# Altium PCB PCB1.PcbDoc
Units mil, origin at the board's own origin, x right, y up, seen from the top; angles counter-clockwise.
Board outline 2725 x 1595 mil, 2 copper layers (Top Layer, Bottom Layer); 40 components, 26 nets, 100 pads, 4 vias.
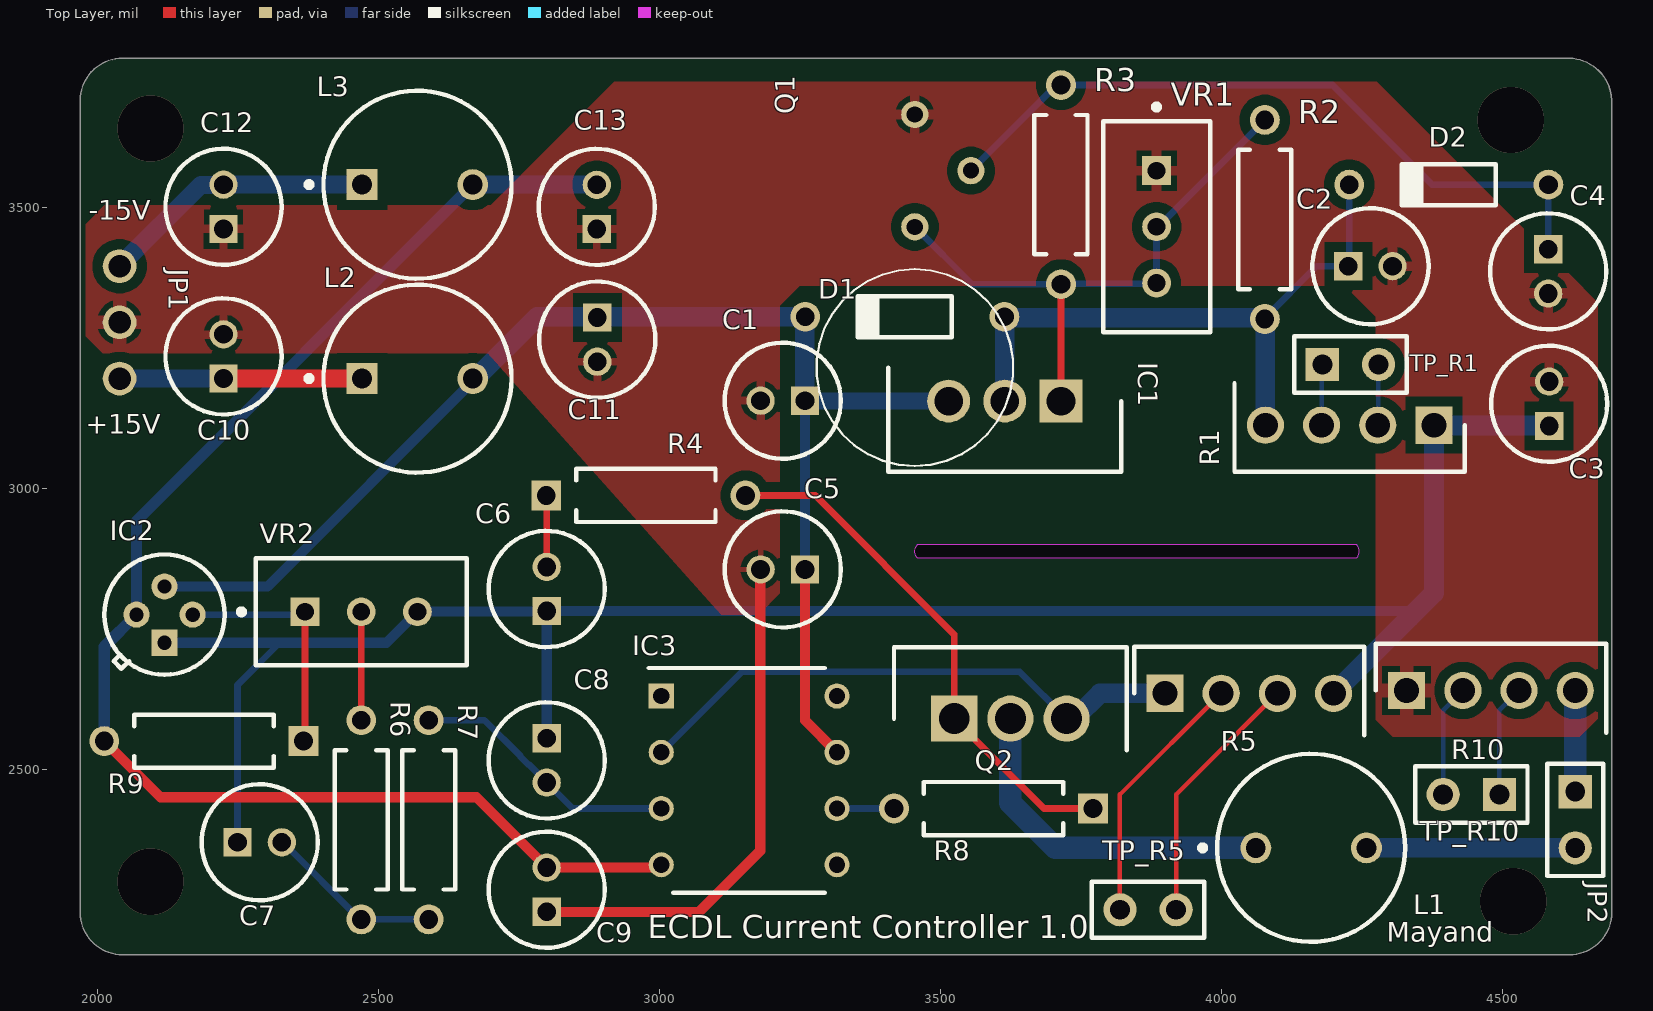
[diagram p0: Top Layer view]
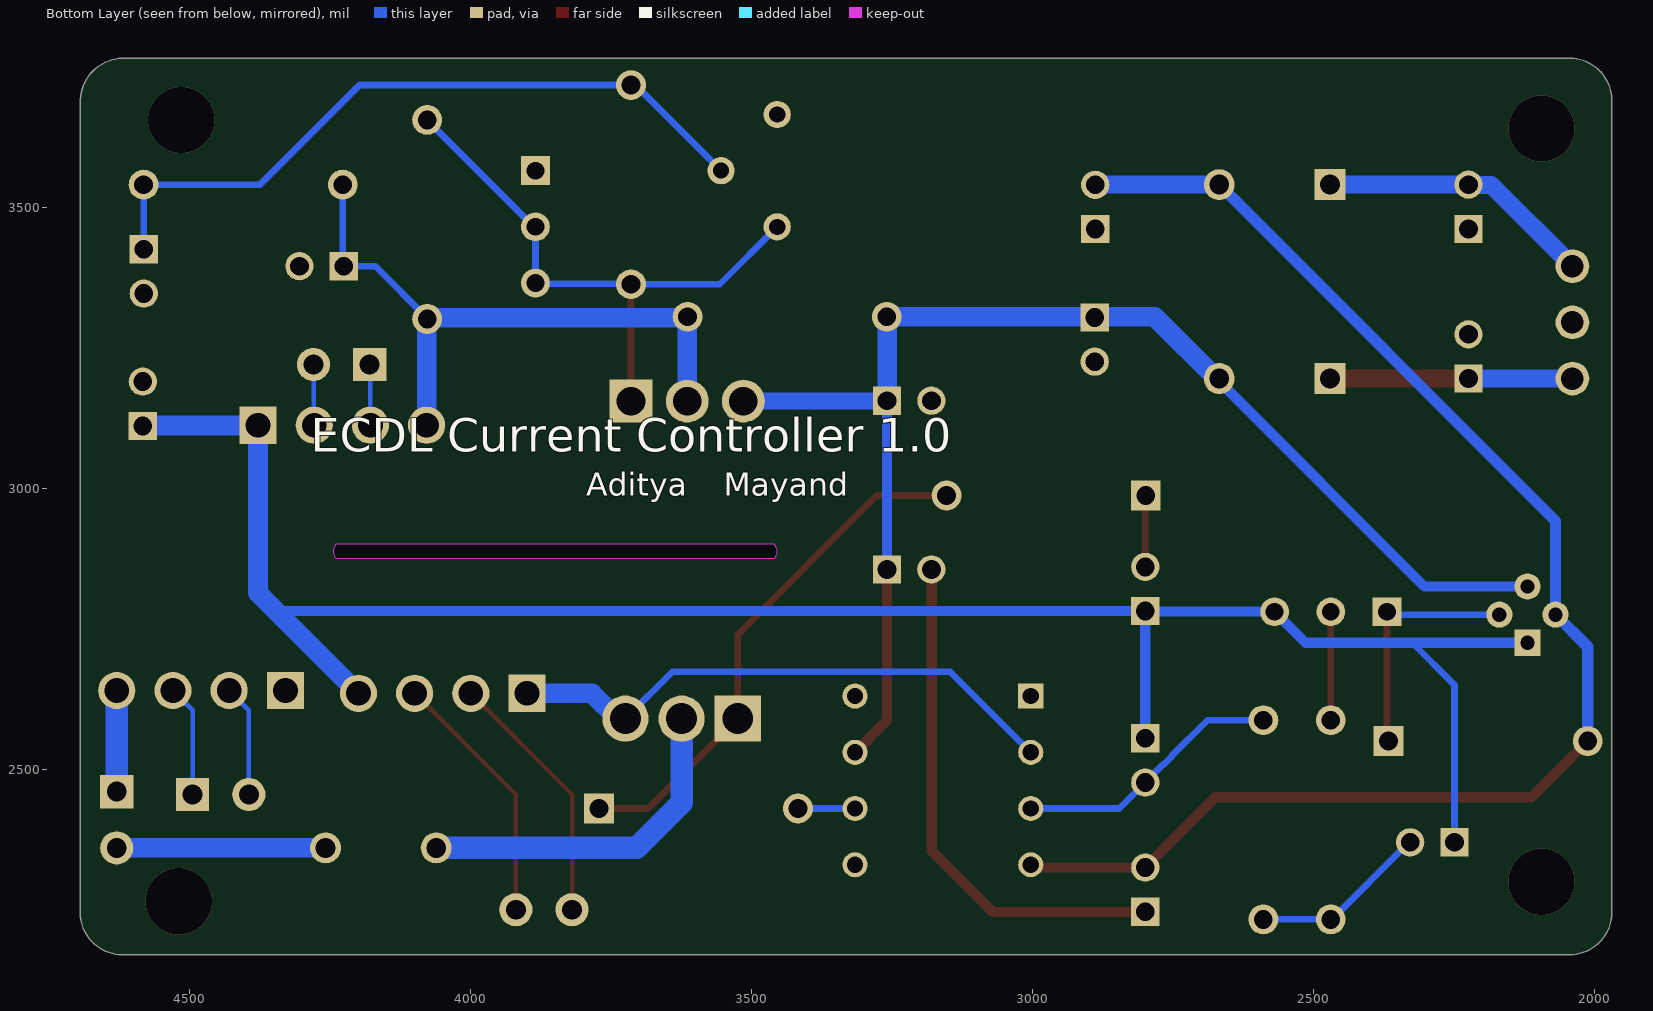
[diagram p1: Bottom Layer view, seen from below]
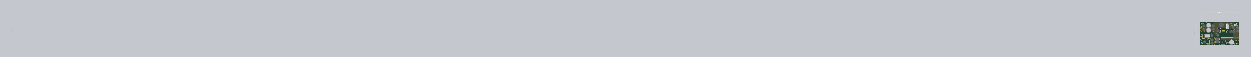
[diagram p2: 3D render of the assembled board from above, using the file's embedded part models]

## Layer stack, top to bottom
Top Solder: solder mask 0.4, Solder Resist, Dk 3.5
Top Layer: signal copper 1.4
Dielectric 1: dielectric 12.6, FR-4, Dk 4.8
Bottom Layer: signal copper 1.4
Bottom Solder: solder mask 0.4, Solder Resist, Dk 3.5

## Board outline
1970,2245 1970,3690 cw(c2045,3690) 2045,3765 4620,3765 cw(c4617.5,3687.5) 4695,3685 4695,2245 cw(c4620,2245) 4620,2170 2045,2170 cw(c2045,2245)
cut-out: 3460,2875 cw(c3472.5,2887.5) 3460,2900 4240,2900 cw(c4227.5,2887.5) 4240,2875

## Design rules (kind name [scope] priority, off if disabled: settings)
Clearance [All] p1: gap=18 ignorepadtopadclearanceinfootprint=TRUE except(0: Arc-Hole Track-Hole SMDPad-Hole THPad-Hole Via-Hole Fill-Hole Poly-Hole Region-Hole Text-Hole; 10: Text-Text; 15: Arc-THPad Track-THPad)
PolygonConnect [All] p1: connectstyle=Relief reliefconductorwidth=10 reliefentries=4 polygonreliefangle="90 Angle" airgapwidth=10
RoutingVias [All] p1: holewidth=28 width=50 viastyle="Through Hole" minholewidth=28 minwidth=50 maxholewidth=28 maxwidth=50
SolderMaskExpansion [All] p1: expansion=4 istentingtop=FALSE
Width [All] p1: maxlimit=40 minlimit=8 preferedwidth=12
30 further rules are at their usual default settings.

## Components (designator, comment, footprint, x,y, rotation, side; value= is the part's Value field where it differs from the comment)
C1 "RFS-16V100ME3#5" CAPPRD200W65D525H1250 3259.37,3155.63 r180 top value=0.1uF
C2 "RFS-16V100ME3#5" CAPPRD200W65D525H1250 4226.26,3395 r0 top value=1uF
C3 "RFS-16V100ME3#5" CAPPRD200W65D525H1250 4583.64,3110.86 r90 top value=22uF
C4 "RFS-16V100ME3#5" CAPPRD200W65D525H1250 4581.91,3425.09 r270 top value=1uF
C5 "RFS-16V100ME3#5" CAPPRD200W65D525H1250 3259.38,2855.42 r180 top value=0.1uF
C6 "RFS-16V100ME3#5" CAPPRD200W65D525H1250 2800,2781.26 r90 top value=8.2nF
C7 "RFS-16V100ME3#5" CAPPRD200W65D525H1250 2250,2370 r0 top value=22uF
C8 "RFS-16V100ME3#5" CAPPRD200W65D525H1250 2800,2555 r270 top value=22uF
C9 "RFS-16V100ME3#5" CAPPRD200W65D525H1250 2800,2246.26 r90 top value=0.1uF
C10 "RFS-16V100ME3#5" CAPPRD200W65D525H1250 2225,3195 r90 top value=0.1uF
C11 "RFS-16V100ME3#5" CAPPRD200W65D525H1250 2890,3303.74 r270 top value=0.1uF
C12 "RFS-16V100ME3#5" CAPPRD200W65D525H1250 2225,3461.26 r90 top value=0.1uF
C13 "RFS-16V100ME3#5" CAPPRD200W65D525H1250 2889.07,3461.03 r90 top value=0.1uF
D1 "1N4148" NXP-SOD27-2_V 3437.17,3305 r180 top
D2 "1N4148" NXP-SOD27-2_V 4405,3540 r180 top
IC1 "LM317AT_NOPB" TO254P470X1028X1955-3P 3715,3155 r180 top
IC2 "LM399H" LM399H 2120,2725 r90 top
IC3 "LT1028ACN8#PBF" DIP794W53P254L1016H394Q8N 3160,2480 r0 top
JP1 "PIN HEADER" 1X03 2040,3295 r270 top
JP2 "Header 2" HDR1X2#1 4630,2460 r270 top
L1 "RL622-101K-RC" INDR62-500-1100X850X1100#1 4160,2360 r0 top value=100µH
L2 "RL622-101K-RC" INDR62-500-1100X850X1100#2 2570,3195 r0 top value=100µH
L3 "RL622-101K-RC" INDR62-500-1100X850X1100#2 2570,3540 r0 top value=100µH
Q1 "2N2905" 2N2905 3454.93,3465 r90 top
Q2 "IRF9Z14PBF" TO254P465X1024X2050-3P 3525,2590 r0 top
R1 "Y09261R00000F9L" TO254P401X1016X2196-4P 4378.63,3112.09 r180 top
R2 "MFR-25FBF52-475K" RESA60-630X240#1 4077.67,3478.08 r270 top value=240
R3 "MFR-25FBF52-475K" RESA60-630X240#1 3715,3540 r270 top value=50k
R4 "MFR-25FBF52-475K" RESA60-630X240#2 2976.35,2987.08 r0 top value=100
R5 "Y09261R00000F9L" TO254P401X1016X2196-4P 3900,2635 r0 top
R6 "MFR-25FBF52-475K" RESA60-630X240#1 2470,2410 r90 top value=3k
R7 "MFR-25FBF52-475K" RESA60-630X240#1 2590,2410 r270 top value=3k
R8 "MFR-25FBF52-475K" RESA60-630X240#2 3595,2430 r180 top value=10k
R9 "MFR-25FBF52-475K" RESA60-630X240#2 2190,2550 r180 top value=7.5k
R10 "Y09261R00000F9L" TO254P401X1016X2196-4P 4330,2640 r0 top
TP_R1 "Header 2" HDR1X2#1 4180,3220 r0 top
TP_R5 "Header 2" HDR1X2#2 3920,2250 r180 top
TP_R10 "Header 2" HDR1X2#1 4495,2455 r180 top
VR1 "3296W-1-103LF" BOUR-3296W 3885,3465 r270 top
VR2 "3296W-1-103LF" BOUR-3296W 2470,2780 r0 top

## Footprints (in the part's own frame and the unit in brackets; to place one, negate y for a bottom-side part, rotate by r counter-clockwise, add the part's x,y. Pads: shape width x height; smd on the part's side, far side on the other; paste and mask are expansions set on the pad)
1X03 [mil]
  round 60 hole 40: 1(-100,0) 2(0,0) 3(100,0)
2N2905 [mm]
  round 1.23 hole 0.73: 1(0,0) 2(2.538,-2.535) 3(5.075,0)
  silkscreen extent -10.81,-4.43 -1.91,4.43, body extent -1.91,-4.45 6.99,4.45, height 6.7
BOUR-3296W [mm] "THD, 3-Leads, Body 9.53x4.83mm, Pitch 2.54mm"
  rect 1.3x1.3 hole 0.8: 1(-2.54,0)
  round 1.3 hole 0.8: 2(0,0) 3(2.54,0)
  silkscreen extent -5.54,-2.41 4.76,2.42, body extent -4.76,-2.4 4.76,2.42, height 11.55
CAPPRD200W65D525H1250 [mm]
  rect 1.275x1.275 hole 0.85: 1(0,0)
  round 1.275 hole 0.85: 2(2,0)
  silkscreen extent -1.63,-2.62 3.62,2.62, body extent -1.75,-2.75 3.75,2.75, height 12.5
DIP794W53P254L1016H394Q8N [mil]
  rect 44.61x44.61 hole 28.86: 1(-156.26,150)
  round 44.61 hole 28.86: 2(-156.26,50) 3(-156.26,-50) 4(-156.26,-150) 5(156.26,-150) 6(156.26,-50) 7(156.26,50) 8(156.26,150)
  silkscreen extent -179,-200 135,200, body extent -161,-200 161,200, height 155
HDR1X2#1 [mm] "Connector; Header; 2 Position"
  rect 1.5x1.5 hole 0.9: 1(0,0)
  round 1.5 hole 0.9: 2(2.54,0)
  silkscreen extent -1.27,-1.27 3.81,1.27
HDR1X2#2 [mm] "Connector; Header; 2 Position"
  round 1.5 hole 0.9: 1(0,0) 2(2.54,0)
  silkscreen extent -1.27,-1.27 3.81,1.27
INDR62-500-1100X850X1100#1 [mm] "THD, 2-Leads, Dia 8.5mm, Pitch 5mm"
  round 1.4 hole 0.9: 1(-2.5,0) 2(2.5,0)
  silkscreen extent -5.02,-4.25 4.25,4.25, body extent -4.25,-4.25 4.25,4.25, height 11
INDR62-500-1100X850X1100#2 [mm] "THD, 2-Leads, Dia 8.5mm, Pitch 5mm"
  rect 1.4x1.4 hole 0.9: 1(-2.5,0)
  round 1.4 hole 0.9: 2(2.5,0)
  silkscreen extent -5.02,-4.25 4.25,4.25, body extent -4.25,-4.25 4.25,4.25, height 11
LM399H [mil]
  rect 46.54x46.54 hole 25.37: 1(0,0)
  round 46.54 hole 25.37: 2(50,-50) 3(100,0) 4(50,50)
  silkscreen extent -57,-107 157,107
NXP-SOD27-2_V [mm] "SOD27, 2-Leads, Dia 1.85mm, Body Length 4.25mm, Pin Spacing 9mm"
  round 1.35 hole 0.85: 1(-4.5,0) 2(4.5,0)
  silkscreen extent -2.12,-0.93 2.13,0.92, body extent -4.78,-0.93 4.78,0.92, height 1.85
RESA60-630X240#1 [mm] "Axial Resistor, 2-Leads, Dia 2.4mm, Body Length 6.3mm"
  round 1.35 hole 0.85: 1(-4.5,0) 2(4.5,0)
  silkscreen extent -3.15,-1.2 3.15,1.2, body extent -4.77,-1.19 4.77,1.2, height 2.4
RESA60-630X240#2 [mm] "Axial Resistor, 2-Leads, Dia 2.4mm, Body Length 6.3mm"
  rect 1.35x1.35 hole 0.85: 1(-4.5,0)
  round 1.35 hole 0.85: 2(4.5,0)
  silkscreen extent -3.15,-1.2 3.15,1.2, body extent -4.77,-1.19 4.77,1.2, height 2.4
TO254P401X1016X2196-4P [mm]
  rect 1.68x1.68 hole 1.12: 1(0,0)
  round 1.68 hole 1.12: 2(2.54,0) 3(5.08,0) 4(7.62,0)
  silkscreen extent -1.4,-1.9 9.02,2.11, body extent -1.27,-1.9 8.89,2.11, height 20.7
TO254P465X1024X2050-3P [mm]
  rect 2.085x2.085 hole 1.39: 1(0,0)
  round 2.085 hole 1.39: 2(2.54,0) 3(5.08,0)
  silkscreen extent -2.72,-1.43 7.8,3.22, body extent -2.58,-1.43 7.66,3.22, height 18.77
TO254P470X1028X1955-3P [mm]
  rect 1.935x1.935 hole 1.29: 1(0,0)
  round 1.935 hole 1.29: 2(2.54,0) 3(5.08,0)
  silkscreen extent -2.73,-1.5 7.81,3.2, body extent -3,-1.77 8.09,3.48

## Part data
C1 C2 C3 C4 C5 C6 C7 C8 C9 C10 C11 C12 C13: "Capacitor Polarised", Manufacturer_Name=Elna, Mouser Part Number=555-RFS16V100ME3#5, Datasheet Link=http://www.elna.co.jp/en/capacitor/alumi/catalog/pdf/rfs_e.pdf, Height=12.5mm, Manufacturer_Part_Number=RFS-16V100ME3#5, Mouser Price/Stock=https://www.mouser.co.uk/ProductDetail/Elna/RFS-16V100ME35?qs=HV%2FSjD3ivR%2FtACP0T6MAAg%3D%3D
D1 D2: library part CMP-004-00000-2, "High Speed Diode, 100 V, 0.45 A, -65 to 175 degC, 2-Pin SOD27, RoHS, Bulk", Case/Package=DO, Forward Current=300mA, Forward Voltage=1V, Manufacturer=Fairchild, Max Operating Temperature=175°C, Max Surge Current=4A, Min Operating Temperature=-65°C, Package Quantity=2000, Package Reference=SOD27, Peak Reverse Current=5uA, Power=500mW, Datasheet URL=http://www.nxp.com/documents/data_sheet/1N4148_1N4448.pdf, Datasheet Version=Aug-04, Diameter=1.91mm, Elements=1, Manufacturer URL=https://www.fairchildsemi.com/, Package URL=http://www.nxp.com/documents/data_sheet/1N4148_1N4448.pdf, Packaging=Bulk, Pins=2, Recovery Time=4ns, RoHS Compliant=True
IC1: "Integrated Circuit", Arrow Part Number=LM317AT/NOPB, Manufacturer_Name="Texas Instruments", Mouser Part Number=926-LM317AT/NOPB, Arrow Price/Stock=https://www.arrow.com/en/products/lm317atnopb/texas-instruments?region=nac, Datasheet Link=http://www.ti.com/lit/gpn/lm317a, Height=4.7mm, Manufacturer_Part_Number=LM317AT/NOPB, Mouser Price/Stock=https://www.mouser.co.uk/ProductDetail/Texas-Instruments/LM317AT-NOPB?qs=X1J7HmVL2ZFYFJRcNgsWcQ%3D%3D
IC2: "Integrated Circuit", Manufacturer_Name="Analog Devices", Arrow Part Number=LM399H, Arrow Price/Stock=https://www.arrow.com/en/products/lm399h/analog-devices, Datasheet Link=https://www.analog.com/media/en/technical-documentation/data-sheets/199399fc.pdf, Height=2.667mm, Manufacturer_Part_Number=LM399H
IC3: "Integrated Circuit", Manufacturer_Name="Linear Technology", Datasheet Link=http://cds.linear.com/docs/en/datasheet/1028fd.pdf, Height=3.937mm, Manufacturer_Part_Number=LT1028ACN8#PBF
JP1: library part PINHD-1X3, Package=1X03, DeviceSetName=PINHD-1X3, GateName_1=A, LibraryName=adafruit, SymbolName_1=PINHD3
JP2 TP_R1 TP_R5 TP_R10: "Header, 2-Pin", LatestRevisionDate=17-Jul-2002, LatestRevisionNote="Re-released for DXP Platform.", Publisher="Altium Limited"
L1 L2 L3: library part CMP-006-00013-6, "Radial Inductor, 100 uH, +/- 10%, 0.91 A, -55 to 105 degC, 2-Pin THD, RoHS, Bulk", Case/Package=Radial, Current Rating=910mA, Inductance Tolerance=10%, Manufacturer=Bourns, Max Operating Temperature=105°C, Min Operating Temperature=-55°C, Package Description="2-Pin Radial Lead, Dia 8.5 mm, Pitch 5 mm", Package Quantity=100, Package Reference=INDR62-500-1100X850X1100, Resistance=0.28Ohm, Self Resonant Frequency=3.7MHz, Core Material=Ferrite, Datasheet URL=http://www.bourns.com/docs/Product-Datasheets/rl622_series.pdf, Datasheet Version=Aug-10, Diameter=8.5mm, Lead Pitch=5mm, Mounting Technology=TH, Packaging=Bulk, Pins=2, Q Factor=20, RoHS Compliant=True, Shielding=Unshielded, Tolerance=10%
Q1: "Transistor BJT PNP", Manufacturer_Name=MULTICOMP, Datasheet Link=https://componentsearchengine.com/Datasheets/2/2N2905.pdf, Height=6.6mm, Manufacturer_Part_Number=2N2905
Q2: "MOSFET (P-Channel)", Manufacturer_Name=Vishay, Mouser Part Number=844-IRF9Z14PBF, Arrow Part Number=IRF9Z14PBF, Arrow Price/Stock=https://www.arrow.com/en/products/irf9z14pbf/vishay, Datasheet Link=https://www.vishay.com/docs/91088/91088.pdf, Height=4.65mm, Manufacturer_Part_Number=IRF9Z14PBF, Mouser Price/Stock=https://www.mouser.co.uk/ProductDetail/Vishay-Semiconductors/IRF9Z14PBF/?qs=cvaI6ThkwxtNPJLFfJQjXw%3D%3D
R1 R5 R10: "Resistor", Manufacturer_Name=Vishay, Mouser Part Number=71-VPR221T1R0000FB, Datasheet Link=https://www.mouser.com/datasheet/2/428/vpr22021-470867.pdf, Height=4.01mm, Manufacturer_Part_Number=Y09261R00000F9L, Mouser Price/Stock=https://www.mouser.co.uk/ProductDetail/Vishay-Precision-Group-Foil-Resistors/Y09261R00000F9L?qs=NHnMxE5Fd3z%252BuQNCyVCBVA%3D%3D
R2 R3 R4 R6 R7 R8 R9: library part CMP-009-00055-4, "Axial Resistor, 475 KOhm, +/- 1%, 0.25 W, -55 to 155 degC, 2-Pin THD, RoHS, Bulk", Case/Package=Axial, Manufacturer=Yageo, Max Operating Temperature=155°C, Min Operating Temperature=-55°C, Package Description="2-Pin Axial Lead, Dia 2.4 mm, Body Length 6.3 mm", Package Quantity=200, Package Reference=MFR-25, Power=250mW, Tolerance=1%, Voltage Rating=250V, Datasheet URL=http://www.yageo.com/documents/recent/Yageo%20LR_MFR_2013.pdf, Datasheet Version=Apr-13, Manufacturer URL=http://www.yageo.com/, Mounting Technology=TH, Packaging=Bulk, RoHS Compliant=True
VR1 VR2: library part CMP-009-00038-2, "Square Trimpot(R) Trimming Potentiometer, 10 KOhm, +/- 10%, 0.5 W, -55 to 125 degC, 3-Pin THD, RoHS, Tube", Case/Package=3296W, Manufacturer=Bourns, Max Operating Temperature=150°C, Min Operating Temperature=-55°C, Package Description="3-Pin Through Hole Device, Body 9.53 x 4.83 mm, Pitch 2.54 mm", Package Quantity=50, Power=500mW, Resistance=10k, Tolerance=10%, Voltage Rating=300V, Datasheet URL=http://www.bourns.com/docs/Product-Datasheets/3296.pdf, Datasheet Version=May-16, Manufacturer URL=http://www.bourns.com/, Mounting Technology=TH, Package Reference=3296W, Packaging=Rail/Tube, RoHS Compliant=True

## Via types
v1: diameter 118.11, hole 118.11, Top Layer to Bottom Layer, 4 vias

## Nets (pads, with @x,y where several pads share a name; then routed paths per layer and width w, separated by ;. In a path a pad name is that pad's centre, name@x,y a point inside that pad or via, vN(x,y) a via of type N, cw(c..) or ccw(c..) an arc to the next point about the centre after c; other vN are vias at no path point)
+15V: C1.1 C5.1 C11.1 D1.2 IC1.3 IC2.3 IC3.7 L2.2 | length 2397.5
  Top Layer w18: C5.1 3259.38,2586.88 IC3.7
  Bottom Layer w18: IC2.3 2303.43,2825 2668.43,3190 L2.2 ; C5.1 C1.1
  Bottom Layer w30: D1.2@3259.37,3304.37 D1.2 ; C1.1 3259.69,3155.31 3514.69,3155.31 IC1.3
  Bottom Layer w32: L2.2 L2.2@2673.43,3195 ; C11.1@2888.74,3305 C11.1 C11.1@2891.26,3305
  Bottom Layer w35: L2.2@2673.43,3195 2783.43,3305 C11.1@2888.74,3305 ; C11.1@2891.26,3305 D1.2 ; C1.1 D1.2@3259.37,3304.37
+15V_I: C10.1 JP1.3 L2.1 | length 431.6
  Top Layer w32: C10.1 L2.1
  Bottom Layer w32: JP1.3 C10.1
-15V: C9.2 C13.2 IC2.4 IC3.4 L3.2 R9.2 | length 2569.5
  Top Layer w18: R9.2 2112.83,2450 2675,2450 C9.2 2998.74,2325 IC3.4 ; C13.2 C13.2@2889.82,3539.01
  Bottom Layer w20: R9.2 2012.83,2717.83 IC2.4 2070,2941.57 L3.2
  Bottom Layer w32: L3.2 2668.54,3539.88 2888.95,3539.88 C13.2
-15V_I: C12.2 JP1.1 L3.1 | length 491.6
  Bottom Layer w32: JP1.1 2184.52,3539.52 2224.52,3539.52 C12.2 L3.1
GND: C1.2 C2.2 C3.2 C4.2 C5.2 C9.1 C10.2 C11.2 C12.1 C13.1 JP1.2 Q1.3 R10.1 VR1.1 | length 925.7
  Top Layer w12: C5.2@3180,2854.78 C5.2
  Top Layer w18: C9.1 3071.26,2246.26 3180,2355 C5.2@3180,2854.78
Iout: JP2.2 L1.2 | length 371.6
  Bottom Layer w35: L1.2 JP2.2
NetC2_1: C2.1 D1.1 D2.2 IC1.2 R1.4 R2.2 | length 1138.3
  Top Layer w12: D1.1 D1.1@3614.67,3304.67 ; IC1.2@3614.67,3155.33 IC1.2 ; R2.2@4075.62,3302.96 R2.2
  Top Layer w30: D1.1@3614.67,3304.67 D1.1@3616.37,3302.96 ; R2.2 R2.2@4078.15,3300.43 ; R1.4@4078.15,3112.57 R1.4
  Bottom Layer w12: R2.2 4077.67,3302.67 4170,3395 C2.1 4227.83,3396.57 D2.2
  Bottom Layer w35: IC1.2@3614.67,3155.33 D1.1@3614.67,3304.67 ; D1.1@3616.37,3302.96 R2.2@4075.62,3302.96 ; R1.4@4078.15,3112.57 R2.2@4078.15,3300.43
NetC4_1: C4.1 D2.1 Q1.2 R3.1 | length 1286.7
  Bottom Layer w12: Q1.2 3706.98,3717.17 R3.1 ; R3.1@3710.07,3717.17 4197.83,3717.17 4375,3540 D2.1 ; C4.1 4582.17,3425.35 D2.1@4582.17,3542.83
NetC6_2: C6.2 R4.1 | length 127.4
  Top Layer w12: R4.1 2800,2986.26 C6.2
NetC7_2: C7.2 R6.1 R7.2 | length 318.1
  Bottom Layer w12: C7.2 2330.79,2370 2467.95,2232.83 R6.1 R7.2
NetC8_2: C8.2 IC3.3 R7.1 | length 479.5
  Bottom Layer w12: R7.1 2689.09,2587.17 2753.9,2522.36 2753.9,2521.2 2766.2,2508.9 2767.36,2508.9 C8.2 2846.26,2430 IC3.3
NetIC1_1: IC1.1 Q1.1 R2.1 R3.2 VR1.2 VR1.3 | length 1052.6
  Top Layer w12: IC1.1 R3.2
  Bottom Layer w12: Q1.1 3557.09,3362.83 R3.2 3716.08,3363.92 3883.92,3363.92 VR1.3 VR1.2 3887.42,3465 R2.1
NetIC2_2: IC2.2 R9.1 VR2.1 | length 433.2
  Top Layer w12: R9.1 2370,2552.83 VR2.1
  Bottom Layer w12: IC2.2 2365,2775 VR2.1
NetIC3_2: IC3.2 Q2.3 R5.1 | length 1008.8
  Bottom Layer w12: IC3.2 3147.04,2673.3 3641.7,2673.3 Q2.3
  Bottom Layer w30: Q2.3 Q2.3@3739.09,2590
  Bottom Layer w35: Q2.3@3739.09,2590 3784.09,2635 R5.1
NetIC3_6: IC3.6 R8.2 | length 101.6
  Bottom Layer w12: IC3.6 R8.2
NetJP2_1: JP2.1 R10.4 | length 180
  Bottom Layer w40: JP2.1 R10.4
NetL1_1: L1.1 Q2.2 | length 619.7
  Bottom Layer w40: Q2.2 3625,2440 3705,2360 L1.1
NetQ2_1: Q2.1 R4.2 R8.1 | length 937.3
  Top Layer w12: R4.2 3277.92,2987.08 3525,2740 Q2.1 3685,2430 R8.1
NetR1_2: R1.2 TP_R1.2 | length 108.5
  Bottom Layer w8: R1.2@4279.32,3112.77 TP_R1.2@4279.32,3219.32
  Bottom Layer w12: R1.2 R1.2@4279.32,3112.77 ; TP_R1.2@4279.32,3219.32 TP_R1.2
NetR1_3: R1.3 TP_R1.1 | length 108.5
  Bottom Layer w8: R1.3 TP_R1.1@4178.63,3218.63
  Bottom Layer w12: TP_R1.1@4178.63,3218.63 TP_R1.1
NetR5_2: R5.2 TP_R5.2 | length 459.6
  Top Layer w8: TP_R5.2 3820,2455 R5.2
NetR5_3: R5.3 TP_R5.1 | length 463.8
  Top Layer w8: TP_R5.1 3920,2455 R5.3
  Bottom Layer w8: TP_R5.1 TP_R5.1@3920,2254.27
NetR6_2: R6.2 VR2.2 | length 192.8
  Top Layer w12: R6.2 VR2.2
NetR10_2: R10.2 TP_R10.2 | length 199.5
  Bottom Layer w8: TP_R10.2 4395,2605 R10.2
NetR10_3: R10.3 TP_R10.1 | length 199.5
  Bottom Layer w8: TP_R10.1 4495,2605 R10.3
Vreg: C3.1 C6.1 C7.1 C8.1 IC2.1 R1.1 R5.4 VR2.3 | length 3628.5
  Top Layer w30: R1.1 R1.1@4379.25,3111.47 ; C3.1@4583.03,3111.47 C3.1
  Bottom Layer w12: C7.1 2250,2650 2325,2725
  Bottom Layer w18: IC2.1 2325,2725 2515,2725 VR2.3 2570.63,2780.63 2799.37,2780.63 C6.1 ; C8.1 C6.1 ; 4335,2770 4340,2770 4340,2781.26 C6.1
  Bottom Layer w35: R5.4 4335,2770 4378.63,2813.63 R1.1 ; R1.1@4379.25,3111.47 C3.1@4583.03,3111.47
pads on no net: IC3.1 IC3.5 IC3.8
copper on no net:
  other v1: 4520,2265 2095,2300 2095,3640 4515,3655

## Polygon pours and split planes (outlines as drawn)
GND on Top Layer "GND" (solid, pour order 0): 2012.96,3502.96 1980,3470 1980,3270 2010,3240 2694.96,3240 3110.14,2775 3177.04,2775 3215,2812.96 3215,3325 3250,3360 4220,3360 4275,3305 4275,2587.96 4305,2557.96 4637.96,2557.96 4670,2590 4670,3330 4277.04,3722.96 2920,3722.96 2700,3502.96

## Silkscreen, mask and mechanical layers (free items; w line width, h text height)
Top Overlay:
  text "-15V" at 1985,3465.67 h60
  text "+15V" at 1980,3085.67 h60
  text "ECDL Current Controller 1.0" at 2980,2185.78 h70
  text "Mayand" at 4295,2181.27 h60
Bottom Overlay:
  text "ECDL Current Controller 1.0" at 4285,3065 h60
  text "Mayand" at 3550,2973.15 h70
  text "Aditya" at 3795,2973.15 h70
Mechanical 1:
  the board outline again, w0

## Dimensions
1970,3775 to 1970,2245 on Top Overlay
2045,3765 to 4620,3765 on Top Overlay